# Altium PCB MOTOR_DRIVER.PcbDoc (part 1 of 2)
Units mm, origin at the board's own origin, x right, y up, seen from the top; angles counter-clockwise.
Board outline 115 x 60 mm, 2 copper layers (Top Layer, Bottom Layer), stack 1.58 mm thick; 121 components, 33 nets, 418 pads, 33 vias.
Unrouted connection lines stored in the file: 233.
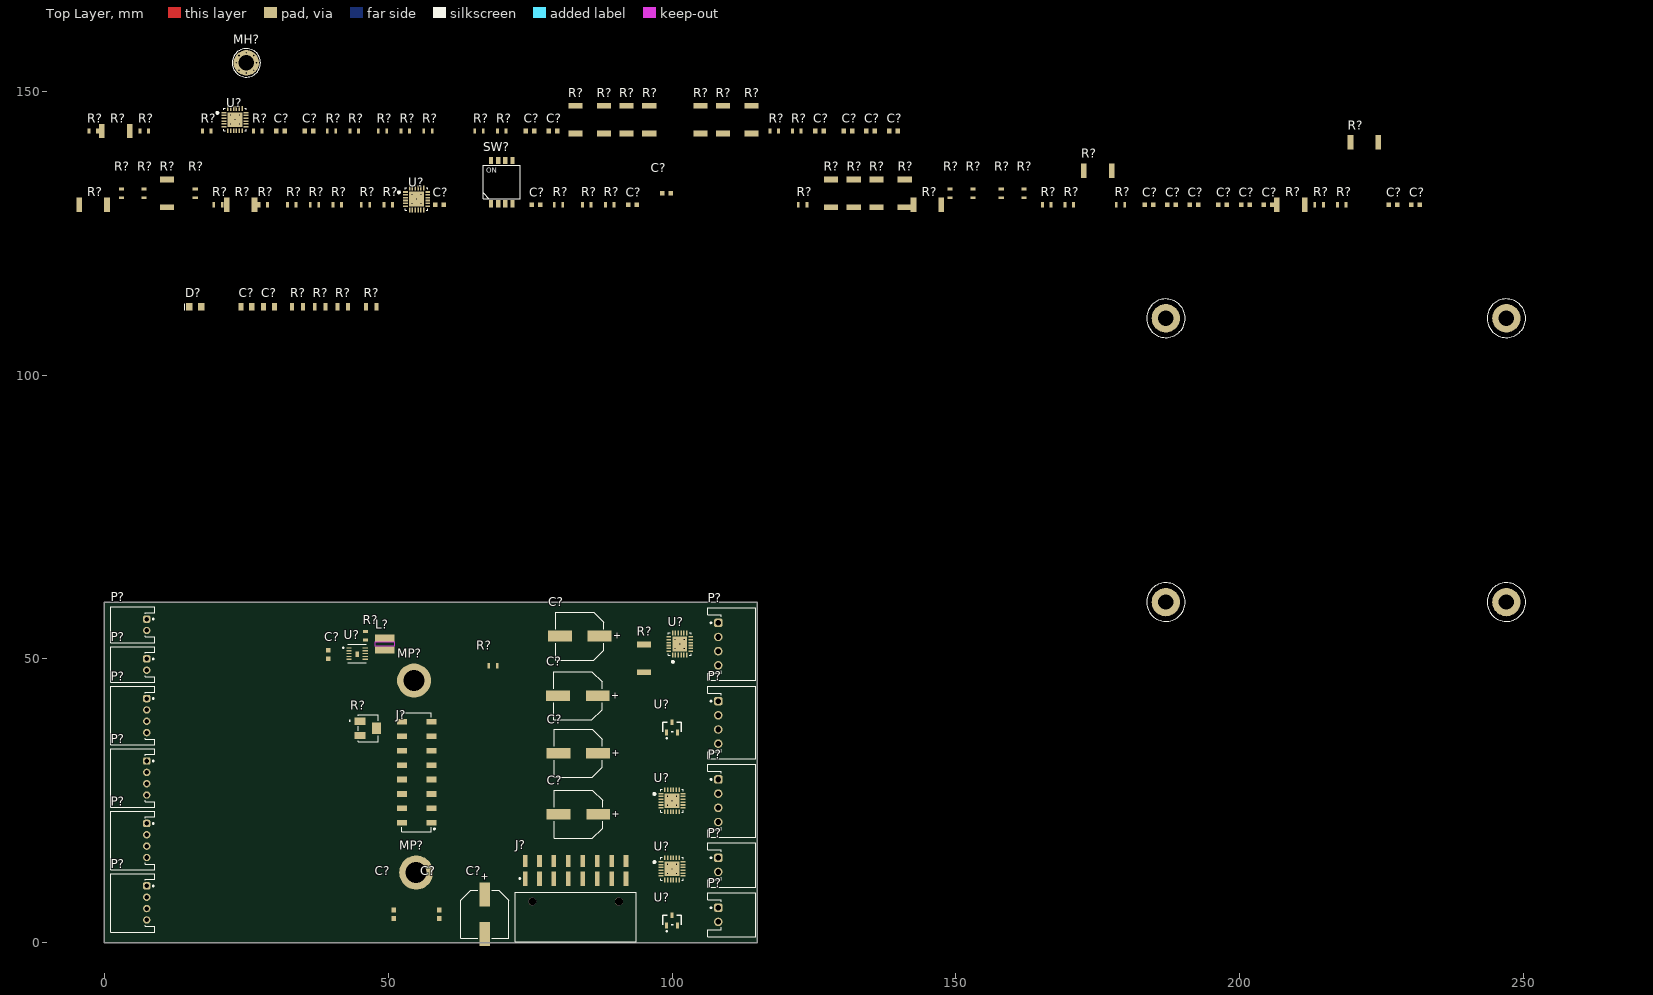
[diagram p0: Top Layer view]
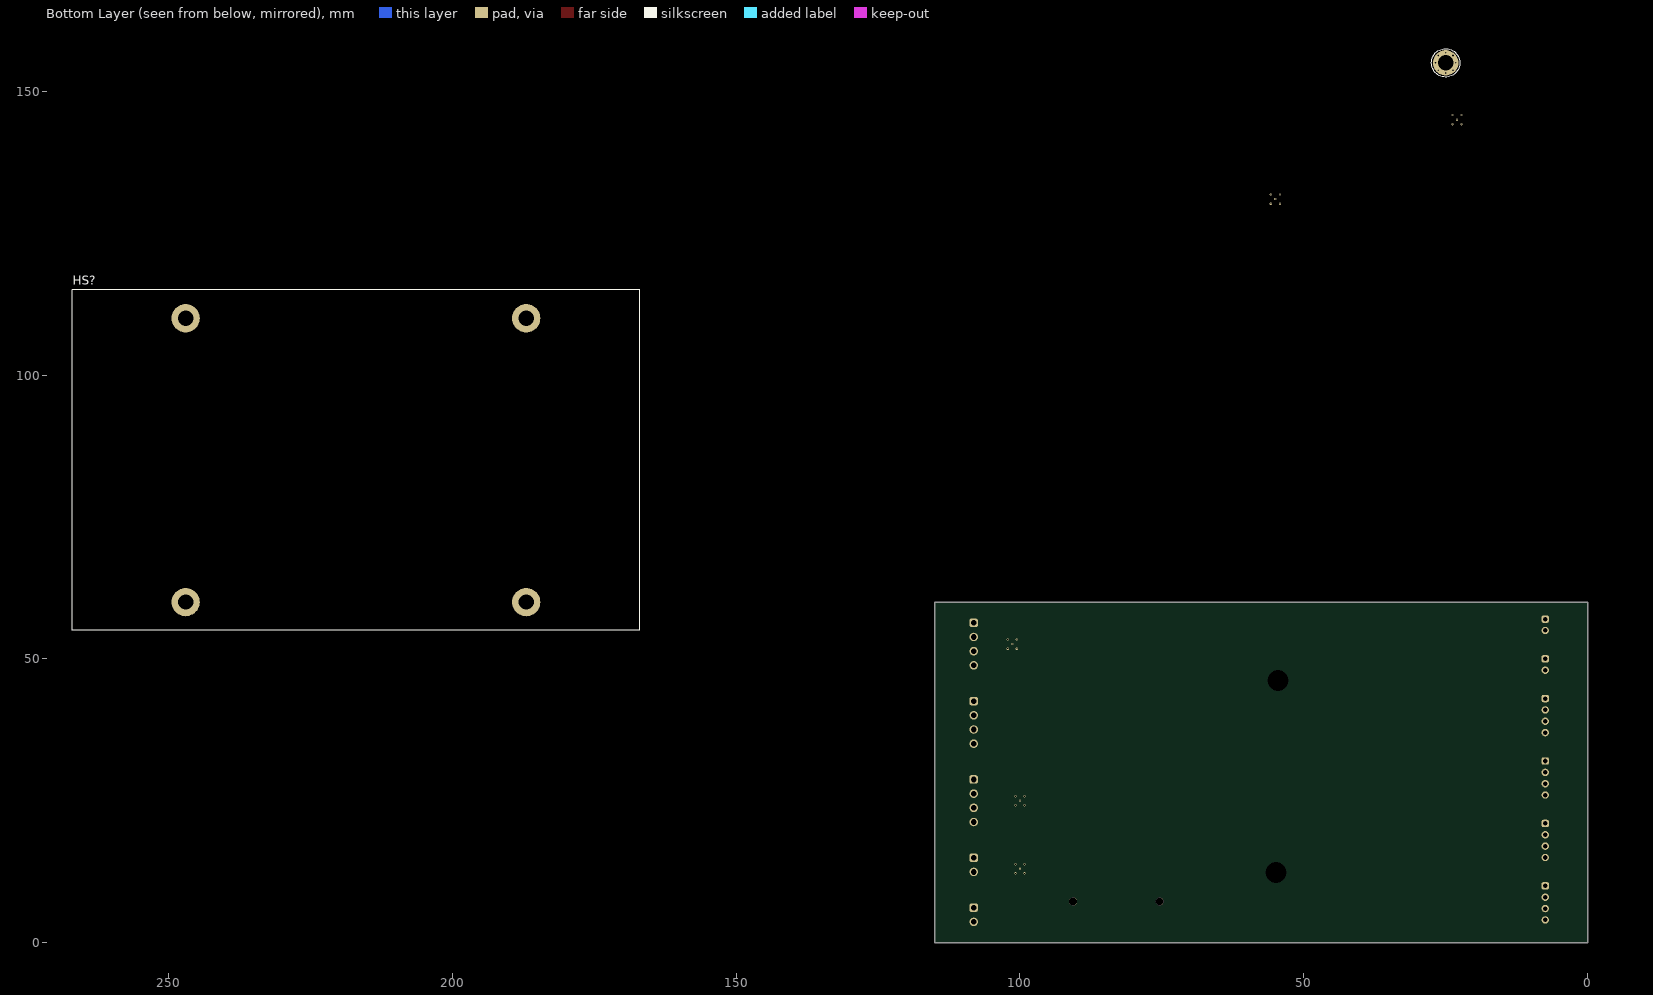
[diagram p1: Bottom Layer view, seen from below]

## Layer stack, top to bottom
Top Solder: solder mask 0.0102, Solder Resist, Dk 3.5
Top Layer: signal copper 0.07
Dielectric 1: dielectric 1.44, FR-4, Dk 4.8
Bottom Layer: signal copper 0.07
Bottom Solder: solder mask 0.0102, Solder Resist, Dk 3.5

## Board outline
0,0 115,0 115,60 0,60

## Design rules (kind name [scope] priority, off if disabled: settings)
Clearance [All] p1: gap=0.18 ignorepadtopadclearanceinfootprint=FALSE
HoleSize [All] p1: absolutevalues=TRUE maxlimit=4 minlimit=0.025 maxpercent=80.000 minpercent=20.000
PolygonConnect [All] p1: connectstyle=Relief reliefconductorwidth=0.254 reliefentries=4 polygonreliefangle="90 Angle" airgapwidth=0.254
RoutingVias [All] p1: holewidth=0.711 width=1.27 viastyle="Through Hole" minholewidth=0.711 minwidth=1.27 maxholewidth=0.711 maxwidth=1.27
SolderMaskExpansion [All] p1: expansion=0.102 istentingtop=FALSE
SupplyNets "Schematic Supply Nets_5" [InNet('GND')] p1: voltage=0.000
SupplyNets "Schematic Supply Nets_9" [InNet('+3V3')] p2: voltage=0.000
SupplyNets "Schematic Supply Nets_8" [InNet('+VREF_STPR')] p3: voltage=0.000
SupplyNets "Schematic Supply Nets_7" [InNet('VREF_STPR')] p4: voltage=0.000
SupplyNets "Schematic Supply Nets_4" [InNet('+VREF_DCMT')] p5: voltage=0.000
SupplyNets "Schematic Supply Nets_1" [InNet('+24V_PSU')] p6: voltage=0.000
SupplyNets "Schematic Supply Nets" [InNet('GND_ISO')] p7: voltage=0.000
Width [All] p1: maxlimit=0.254 minlimit=0.254 preferedwidth=0.254
29 further rules are at their usual default settings.

## Classes and differential pairs
component class 3_MOTORES_DC: C? P? R? U?
component class 2_MOTORES_DE_PASSO: C? P? R? SW? U?
component class 1_ENTRADA_DE_ALIMENTACAO: C? D? HS? J? L? MH? R? U?
component class 5_IO_EXTERNOS: J? MP?

## Components (designator, comment, footprint, x,y, rotation, side; value= is the part's Value field where it differs from the comment)
C? "33μF, 50V" WCAP-ASLI_D8H6.5 67,5 r90 top
C? "10nF, 10V" WCAP-CSGP_0603_L1.6W0.8H0.8_Reflow 184,130 r0 top
C? "10nF, 10V" WCAP-CSGP_0603_L1.6W0.8H0.8_Reflow 205,130 r0 top
C? "330nF, 10V" WCAP-CSGP_0603_L1.6W0.8H0.8_Reflow 76,130 r0 top
C? "1nF, 10V" WCAP-CSGP_0603_L1.6W0.8H0.8_Reflow 188,130 r0 top
C? "330nF, 50V" WCAP-CSGP_0603_L1.6W0.8H0.8_Reflow 197,130 r0 top
C? "33μF, 50V" WCAP-ASLI_D8H6.5 83.425,43.5 r0 top
C? "2.2μF, 10V" WCAP-CSGP_0603_L1.6W0.8H0.8_Reflow 59,5 r90 top
C? "1nF, 10V" WCAP-CSGP_0603_L1.6W0.8H0.8_Reflow 59,130 r0 top
C? "10nF, 10V" WCAP-CSGP_0603_L1.6W0.8H0.8_Reflow 192,130 r0 top
C? "330nF, 50V" WCAP-CSGP_0603_L1.6W0.8H0.8_Reflow 93,130 r0 top
C? "100nF, 50V" WCAP-CSGP_0603_L1.6W0.8H0.8_Reflow 51,5 r90 top
C? "1μF, 50V" WCAP-CSGP_0805_L2W1.25H1.25 29,112 r0 top
C? "470nF, 50V" WCAP-CSGP_0805_L2W1.25H1.25 25,112 r0 top
C? "330nF, 10V" WCAP-CSGP_0603_L1.6W0.8H0.8_Reflow 201,130 r0 top
C? "33μF, 50V" WCAP-ASLI_D8H6.5 83.475,33.35 r0 top
C? "330nF, 10V" WCAP-CSGP_0603_L1.6W0.8H0.8_Reflow 231,130 r0 top
C? "330nF, 50V" WCAP-CSGP_0603_L1.6W0.8H0.8_Reflow 227,130 r0 top
C? "1nF, 10V" WCAP-CSGP_0603_L1.6W0.8H0.8_Reflow 99,132 r0 top
C? "33μF, 50V" WCAP-ASLI_D8H6.5 83.5,22.6 r0 top
C? "10nF, 10V" WCAP-CSGP_0603_L1.6W0.8H0.8_Reflow 79,143 r0 top
C? "10nF, 10V" WCAP-CSGP_0603_L1.6W0.8H0.8_Reflow 75,143 r0 top
C? "1nF, 10V" WCAP-CSGP_0603_L1.6W0.8H0.8_Reflow 31,143 r0 top
C? "1nF, 10V" WCAP-CSGP_0603_L1.6W0.8H0.8_Reflow 36,143 r0 top
C? "330nF, 10V" WCAP-CSGP_0603_L1.6W0.8H0.8_Reflow 131,143 r0 top
C? "330nF, 10V" WCAP-CSGP_0603_L1.6W0.8H0.8_Reflow 126,143 r0 top
C? "330nF, 50V" WCAP-CSGP_0603_L1.6W0.8H0.8_Reflow 139,143 r0 top
C? "330nF, 50V" WCAP-CSGP_0603_L1.6W0.8H0.8_Reflow 135,143 r0 top
C? "33μF, 50V" WCAP-ASLI_D8H6.5 83.75,54 r0 top
C? "NM" WCAP-CSGP_0603_L1.6W0.8H0.8_Reflow 39.425,50.75 r90 top
D? "Red, 2V, 140°" WL-SMCW_0805_150080xx75000 16,112 r0 top
HS? "HEATSINK" ? 167,55 r90 bottom
J? "610116249221" 610116249221 83,4.5 r0 top
J? "61031621821" 61031621821 55,30 r90 top
L? "47uH, 500mA" WE-MAIA_3015 49.375,52.6 r90 top
MH? "Mounting Hole 2.5mm" MOUNTING_HOLE_M2P5_PLATED 25,155 r0 top
MP? "M2.5 x 10mm" 9774100151 54.55,46.175 r0 top
MP? "M2.5 x 10mm" 9774100151 54.925,12.35 r0 top
P? "62000411722" 62000411722 5,18 r270 top
P? "62000411722" 62000411722 5,40 r270 top
P? "62000411722" 62000411722 5,29 r270 top
P? "62000211722" 62000211722 5,49 r270 top
P? "62000211722" 62000211722 5,56 r270 top
P? "62000411722" 62000411722 5,7 r270 top
P? "68800211722" 68800211722 110.5,13.7 r90 top
P? "68800211722" 68800211722 110.5,4.9 r90 top
P? "68800411722" 68800411722 110.5,25 r90 top
P? "68800411722" 68800411722 110.5,38.8 r90 top
P? "68800411722" 68800411722 110.5,52.6 r90 top
R? "10kΩ" 0603-REFLOW 41,130 r0 top
R? "47.5kΩ" 0603-REFLOW 7,132 r90 top
R? "47.5kΩ" 0603-REFLOW 80,130 r0 top
R? "10kΩ" 0603-REFLOW 37,130 r0 top
R? "0.51Ω" 2010-REFLOW 145,130 r0 top value=510mΩ
R? "0.51Ω" 2010-REFLOW -2,130 r0 top value=510mΩ
R? "11.5kΩ" 0603-REFLOW 46,130 r0 top
R? "10kΩ" 0603-REFLOW 33,130 r0 top
R? "22.1kΩ" 0603-REFLOW 123,130 r0 top
R? "10kΩ" 0603-REFLOW 28,130 r0 top
R? "10kΩ" 0603-REFLOW 16,132 r90 top
R? "1kΩ" 0603-REFLOW 89,130 r0 top
R? "0.51Ω" 2010-REFLOW 222,141 r0 top value=510mΩ
R? "100Ω" 0603-REFLOW 214,130 r0 top
R? "0.51Ω" 2010-REFLOW 136,132 r90 top value=510mΩ
R? "0.51Ω" 2010-REFLOW 141,132 r90 top value=510mΩ
R? "8.87kΩ" 0603-REFLOW 3,132 r90 top
R? "100Ω" 0603-REFLOW 149,132 r90 top
R? "10kΩ" 0603-REFLOW 85,130 r0 top
R? "8.87kΩ" 0603-REFLOW 162,132 r90 top
R? "1kΩ" 0603-REFLOW 158,132 r90 top
R? "0.51Ω" 2010-REFLOW 128,132 r90 top value=510mΩ
R? "0.51Ω" 2010-REFLOW 132,132 r90 top value=510mΩ
R? "47.5kΩ" 0603-REFLOW 153,132 r90 top
R? "0Ω" 0603-REFLOW 45.975,54.05 r270 top
R? "8.87kΩ" 0805-REFLOW 47,112 r0 top
R? "8.87kΩ" 0805-REFLOW 38,112 r0 top
R? "8.87kΩ" 0805-REFLOW 42,112 r0 top
R? "8.87kΩ" 0805-REFLOW 34,112 r0 top
R? "47.5kΩ" 0603-REFLOW 218,130 r0 top
R? "0.51Ω" 2010-REFLOW 11,132 r90 top value=510mΩ
R? "0.51Ω" 2010-REFLOW 209,130 r0 top value=510mΩ
R? "0Ω" 0603-REFLOW 18,143 r0 top
R? "0.51Ω" 2010-REFLOW 2,143 r0 top value=510mΩ
R? "47.5kΩ" 0603-REFLOW 49,143 r0 top
R? "47.5kΩ" 0603-REFLOW 53,143 r0 top
R? "47.5kΩ" 0603-REFLOW 40,143 r0 top
R? "47.5kΩ" 0603-REFLOW 44,143 r0 top
R? "39.2kΩ" 0603-REFLOW 122,143 r0 top
R? "39.2kΩ" 0603-REFLOW 118,143 r0 top
R? "1kΩ" 0603-REFLOW 7,143 r0 top
R? "18.2kΩ" 0603-REFLOW 70,143 r0 top
R? "18.2kΩ" 0603-REFLOW 66,143 r0 top
R? "1kΩ" 0603-REFLOW -2,143 r0 top
R? "39.2kΩ" 0603-REFLOW 57,143 r0 top
R? "39.2kΩ" 0603-REFLOW 68.45,48.775 r0 top
R? "11.5kΩ" 0603-REFLOW 27,143 r0 top
R? "10kΩ, 1/4W" TRIM-3224W 46.45,37.75 r0 top value=10kΩ
R? "0.51Ω" 2010-REFLOW 88,145 r90 top value=510mΩ
R? "0.51Ω" 2010-REFLOW 105,145 r90 top value=510mΩ
R? "0.51Ω" 2010-REFLOW 175,136 r0 top value=510mΩ
R? "0.51Ω" 2010-REFLOW 24,130 r0 top value=510mΩ
R? "22.1kΩ" 0603-REFLOW 20,130 r0 top
R? "0.51Ω" 2010-REFLOW 83,145 r90 top value=510mΩ
R? "47.5kΩ" 0603-REFLOW 166,130 r0 top
R? "22.1kΩ" 0603-REFLOW 50,130 r0 top
R? "10kΩ" 0603-REFLOW 179,130 r0 top
R? "0.51Ω" 2010-REFLOW 92,145 r90 top value=510mΩ
R? "0.51Ω" 2010-REFLOW 95.075,50.075 r90 top value=510mΩ
R? "0.51Ω" 2010-REFLOW 96,145 r90 top value=510mΩ
R? "0.51Ω" 2010-REFLOW 114,145 r90 top value=510mΩ
R? "0.51Ω" 2010-REFLOW 109,145 r90 top value=510mΩ
R? "47.5kΩ" 0603-REFLOW 170,130 r0 top
SW? "416131160804" 416131160804 70,134 r0 top
U? "STSPIN820" 24-TQFPN 23,145 r0 top
U? "STSPIN840" 24-TQFPN 101.35,52.6 r90 top
U? "STSPIN820" 24-TQFPN 55,131 r0 top
U? "TS3431CILT" SOT-23-3 100,38 r0 top
U? "STSPIN820" 24-TQFPN 100,13 r0 top
U? "TS3431CILT" SOT-23-3 100,4 r0 top
U? "L7983PU33R" 10-WFDFN-EP 44.5,50.925 r0 top
U? "STSPIN840" 24-TQFPN 100,25 r0 top

## Footprints (in the part's own frame and the unit in brackets; to place one, negate y for a bottom-side part, rotate by r counter-clockwise, add the part's x,y. Pads: shape width x height; smd on the part's side, far side on the other; paste and mask are expansions set on the pad)
10-WFDFN-EP [mil]
  rect 35.43x9 smd paste+0 mask+0: 1(-57,39.37) 2(-57,19.69) 3(-57,0) 4(-57,-19.68) 5(-57,-39.37) 6(57,-39.37) 7(57,-19.68) 8(57,0) 9(57,19.69) 10(57,39.37)
  rect 24x39 smd paste+0 mask+0: 11(0,-5.91)
  silkscreen extent -98,-64 64,64, body extent -59,-59 59,59, height 30
24-TQFPN [mm]
  rect 0.84x0.27 smd mask+0: 1(-1.945,1.25) 2(-1.945,0.75) 3(-1.945,0.25) 4(-1.945,-0.25) 5(-1.945,-0.75) 6(-1.945,-1.25) 13(1.945,-1.25) 14(1.945,-0.75) 15(1.945,-0.25) 16(1.945,0.25) 17(1.945,0.75) 18(1.945,1.25)
  rect 0.27x0.84 smd mask+0: 7(-1.25,-1.945) 8(-0.75,-1.945) 9(-0.25,-1.945) 10(0.25,-1.945) 11(0.75,-1.945) 12(1.25,-1.945) 19(1.25,1.945) 20(0.75,1.945) 21(0.25,1.945) 22(-0.25,1.945) 23(-0.75,1.945) 24(-1.25,1.945)
  rect 2.6x2.6 smd paste-2539.97 mask+0: 25(0,0)
  silkscreen extent -3.22,-2 2,2, body extent -2,-2 2,2, height 1.1
0603-REFLOW [mm]
  rect 0.5x0.9 smd: 1(-0.75,0) 2(0.75,0)
  body extent -0.8,-0.4 0.8,0.4, height 0.45
0805-REFLOW [mm]
  rect 0.7x1.3 smd: 1(-0.95,0) 2(0.95,0)
  body extent -1,-0.63 1,0.62, height 0.5
2010-REFLOW [mm]
  rect 1x2.5 smd: 1(-2.45,0) 2(2.45,0)
  body extent -2.45,-1.2 2.45,1.2, height 0.55
9774100151 [mm] "SMT Steel Spacer with internal Thread M2.5, height 10mm"
  round 6 / inner round 0 / far side round 0 hole 3.7 unplated: 1(0,0)
  body extent -2.55,-2.55 2.55,2.55, height 10
61031621821 [mm] "Socket Header, Pitch 2.54 mm, SMT, Vertical, dual row, 16p"
  rect 1x1.8 smd: 1(-8.89,-2.6) 2(-8.89,2.6) 3(-6.35,-2.6) 4(-6.35,2.6) 5(-3.81,-2.6) 6(-3.81,2.6) 7(-1.27,-2.6) 8(-1.27,2.6) 9(1.27,-2.6) 10(1.27,2.6) 11(3.81,-2.6) 12(3.81,2.6) 13(6.35,-2.6) 14(6.35,2.6) 15(8.89,-2.6) 16(8.89,2.6)
  silkscreen extent -10.49,-3.27 10.49,2.62, body extent -10.16,-3.35 10.16,3.35, height 8.52
62000211722 [mm] "2.00mm Male Horizontal Shrouded Header, 2p"
  rrect50% 1.3x1.3 hole 0.8: 1(-1,2.45)
  round 1.3 hole 0.8: 2(1,2.45)
  silkscreen extent -3.15,-3.9 3.15,3.9, body extent -3,-3.8 3,3.8, height 4.83
62000411722 [mm] "2.00mm Male Horizontal Shrouded Header, 4p"
  rrect50% 1.3x1.3 hole 0.8: 1(-3,2.45)
  round 1.3 hole 0.8: 2(-1,2.45) 3(1,2.45) 4(3,2.45)
  silkscreen extent -5.15,-3.9 5.15,3.9, body extent -5,-3.8 5,3.8, height 4.83
68800211722 [mm] "2.50mm ¡°J¡± Type Male Horizontal Shrouded Header, 2p"
  rrect50% 1.5x1.5 hole 1: 1(1.25,2.35)
  round 1.5 hole 1: 2(-1.25,2.35)
  silkscreen extent -3.9,-4.25 3.9,4.25, body extent -3.75,-4.15 3.75,4.15, height 4.23
68800411722 [mm] "2.50mm ¡°J¡± Type Male Horizontal Shrouded Header, 4p"
  rrect50% 1.5x1.5 hole 1: 1(3.75,2.35)
  round 1.5 hole 1: 2(1.25,2.35) 3(-1.25,2.35) 4(-3.75,2.35)
  silkscreen extent -6.4,-4.25 6.4,4.25, body extent -6.25,-4.15 6.25,4.15, height 4.23
416131160804 [mm] "SMD Dip Switch, Small Compact, Raised Actuator, 4pin"
  rect 0.76x1.27 smd: 1(-1.905,-3.81) 2(-0.635,-3.81) 3(0.635,-3.81) 4(1.905,-3.81) 5(1.905,3.81) 6(0.635,3.81) 7(-0.635,3.81) 8(-1.905,3.81)
  silkscreen extent -3.27,-2.93 3.27,2.93, body extent -3.12,-4.22 3.13,4.22, height 2.7
610116249221 [mm] "Socket Header, Pitch 2.54 mm, SMT, Angled, dual row, 16p"
  rect 0.8x2.5 smd: 1(-8.89,6.76) 3(-6.35,6.76) 5(-3.81,6.76) 7(-1.27,6.76) 9(1.27,6.76) 11(3.81,6.76) 13(6.35,6.76) 15(8.89,6.76)
  rect 0.8x2.1 smd: 2(-8.89,9.89) 4(-6.35,9.89) 6(-3.81,9.89) 8(-1.27,9.89) 10(1.27,9.89) 12(3.81,9.89) 14(6.35,9.89) 16(8.89,9.89)
  round 1.4 hole 1.4 unplated: MH1(-7.62,2.75) MH2(7.62,2.75)
  silkscreen extent -10.66,-4.35 10.66,6.9, body extent -10.41,-4.25 10.41,10.44, height 5.03
MOUNTING_HOLE_M2P5_PLATED [mm]
  round 4.5 hole 2.7: H(0,0)
  silkscreen extent -2.5,-2.5 2.5,2.5
SOT-23-3 [mil]
  rect 20x40 smd mask+3.94: 1(-37.4,-38) 2(37.4,-38) 3(0,32.75)
  silkscreen extent -65,-84 65,32, body extent -57,-47 57,47, height 44
TRIM-3224W [mm]
  rect 1.9x1.3 smd: 1(-1.45,1.25) 3(-1.45,-1.25)
  rect 1.6x2 smd: 2(1.45,0)
  silkscreen extent -3.32,-2.4 1.75,2.4, body extent -1.95,-2.4 1.95,2.4, height 5.3
WCAP-ASLI_D8H6.5 [mm] "Aluminium Electrolytic V-Chip SMT Capacitors, 8x6.5mm"
  rect 4.2x1.9 smd: 1(3.5,0) 2(-3.5,0)
  silkscreen extent -4.25,-4.25 4.25,4.25, body extent -4.5,-4.15 4.5,4.15, height 6.45
WCAP-CSGP_0603_L1.6W0.8H0.8_Reflow [mm] "Ceramic Capacitors, body 1.6x0.8mm"
  rect 0.8x0.8 smd: 1(-0.75,0) 2(0.75,0)
  body extent -0.8,-0.4 0.8,0.4, height 0.8
WCAP-CSGP_0805_L2W1.25H1.25 [mm] "Ceramic Capacitors, body 2x1.25mm"
  rect 0.9x1.3 smd: 1(-0.95,0) 2(0.95,0)
  body extent -1,-0.63 1,0.63, height 1.25
WE-MAIA_3015 [mm] "SMD Power Inductor, 2-leads, body 3x3mm"
  rect 1.3x3.4 smd: 1(-1.05,0) 2(1.05,0)
  Top Layer keep-out region: -0.4,1.7 0.4,1.7 0.4,-1.7 -0.4,-1.7
  body extent -1.5,-1.5 1.5,1.5, height 1.5
WL-SMCW_0805_150080xx75000 [mm] "SMD Mono-color Chip LED, body 2.0x1.25mm"
  rect 1.1x1.3 smd: 1(-1.05,0) 2(1.05,0)
  silkscreen extent -2,-0.6 -1.8,0.6, body extent -1,-0.63 1,0.62, height 0.7
? [mm]
  round 5 hole 2.7: H1(5,80) H1(55,80) H2(5,20) H2(55,20)
  silkscreen extent 0,0 60,100, body extent 0,0 60,100, height 10

## Part data
C? C? C? C? C?: library part 865080649011, "WCAP-ASLI Aluminum Electrolytic Capacitor, V-Chip, SMT, 8mm x 6.5mm, 33μF, 50V", Capacitance=33uF, Leakage Current=16.5uA, Manufacturer="Wurth Elektronik", Operating Temperature Max=105degC, Operating Temperature Min=-55degC, Rated Voltage (DC)=50V, Ripple Current=200mA, Category="Aluminum Electrolytic Capacitors", ComponentLink1Description="Website Link", ComponentLink1URL=https://www.we-online.com/redexpert/article/865080649011?ad, ComponentLink2Description="Datasheet Link", ComponentLink2URL=https://www.we-online.com/redexpert/spec/865080649011?ad, Diameter=8mm, Dissipation Factor=12%, Endurance=2000h, Height=6.5mm, Impedance=700mohm, Manufacturer Part Number=865080649011, Match Code=WCAP-ASLI, Mount="Surface Mount", Packaging="Tape and Reel"
C? C? C? C? C?: library part 885012206014, "WCAP-CSGP Multilayer Ceramic Chip Capacitor, General Purpose, size 0603, 10nF, 10V", Capacitance=10nF, Capacitance Tolerance=+/-10%, Case/Size Code=0603, Insulation Resistance=10GΩ, Manufacturer="Wurth Elektronik", Max Operating Temperature=125°C, Min Operating Temperature=-55°C, Rated Voltage (DC)=10V, Category="Multilayer Ceramic Chip Capacitors", Ceramic Type=X7R, ComponentLink1Description="Website Link", ComponentLink1URL=https://www.we-online.com/redexpert/article/885012206014?ad, ComponentLink2Description="Datasheet Link", ComponentLink2URL=https://www.we-online.com/redexpert/spec/885012206014?ad, Dissipation Factor=5%, Height=0.8mm, Length=1.6mm, Manufacturer Part Number=885012206014, Match Code=WCAP-CSGP, Mount="Surface Mount", Packaging="Tape and Reel", Technical Reference=X7R0603103K010DFCT10000, Width=0.8mm
C? C? C? C? C?: library part 885012206023, "WCAP-CSGP Multilayer Ceramic Chip Capacitor, General Purpose, size 0603, 330nF, 10V", Capacitance=330nF, Capacitance Tolerance=+/-10%, Case/Size Code=0603, Insulation Resistance=1.5GΩ, Manufacturer="Wurth Elektronik", Max Operating Temperature=125°C, Min Operating Temperature=-55°C, Rated Voltage (DC)=10V, Category="Multilayer Ceramic Chip Capacitors", Ceramic Type=X7R, ComponentLink1Description="Website Link", ComponentLink1URL=https://www.we-online.com/redexpert/article/885012206023?ad, ComponentLink2Description="Datasheet Link", ComponentLink2URL=https://www.we-online.com/redexpert/spec/885012206023?ad, Dissipation Factor=10%, Height=0.8mm, Length=1.6mm, Manufacturer Part Number=885012206023, Match Code=WCAP-CSGP, Mount="Surface Mount", Packaging="Tape and Reel", Technical Reference=X7R0603334K010DFCT10000, Width=0.8mm
C? C? C? C? C?: library part 885012206008, "WCAP-CSGP Multilayer Ceramic Chip Capacitor, General Purpose, size 0603, 1nF, 10V", Capacitance=1nF, Capacitance Tolerance=+/-10%, Case/Size Code=0603, Insulation Resistance=10GΩ, Manufacturer="Wurth Elektronik", Max Operating Temperature=125°C, Min Operating Temperature=-55°C, Rated Voltage (DC)=10V, Category="Multilayer Ceramic Chip Capacitors", Ceramic Type=X7R, ComponentLink1Description="Website Link", ComponentLink1URL=https://www.we-online.com/redexpert/article/885012206008?ad, ComponentLink2Description="Datasheet Link", ComponentLink2URL=https://www.we-online.com/redexpert/spec/885012206008?ad, Dissipation Factor=5%, Height=0.8mm, Length=1.6mm, Manufacturer Part Number=885012206008, Match Code=WCAP-CSGP, Mount="Surface Mount", Packaging="Tape and Reel", Technical Reference=X7R0603102K010DFCT10000, Width=0.8mm
C? C? C? C? C?: library part 885012206121, "WCAP-CSGP Multilayer Ceramic Chip Capacitor, General Purpose, size 0603, 330nF, 50V", Capacitance=330nF, Capacitance Tolerance=+/-10%, Case/Size Code=0603, Insulation Resistance=1.5GΩ, Manufacturer="Wurth Elektronik", Max Operating Temperature=125°C, Min Operating Temperature=-55°C, Rated Voltage (DC)=50V, Category="Multilayer Ceramic Chip Capacitors", Ceramic Type=X7R, ComponentLink1Description="Website Link", ComponentLink1URL=https://www.we-online.com/redexpert/article/885012206121?ad, ComponentLink2Description="Datasheet Link", ComponentLink2URL=https://www.we-online.com/redexpert/spec/885012206121?ad, Dissipation Factor=10%, Height=0.8mm, Length=1.6mm, Manufacturer Part Number=885012206121, Match Code=WCAP-CSGP, Mount="Surface Mount", Packaging="Tape and Reel", Technical Reference=X7R0603334K050DFCT10000, Width=0.8mm
C?: library part 885012206027, "WCAP-CSGP Multilayer Ceramic Chip Capacitor, General Purpose, size 0603, 2.2μF, 10V", Capacitance=2.2uF, Capacitance Tolerance=+/-10%, Case/Size Code=0603, Insulation Resistance=0.02Gohm, Manufacturer="Wurth Elektronik", Operating Temperature Max=125degC, Operating Temperature Min=-55degC, Rated Voltage (DC)=10V, Category="Multilayer Ceramic Chip Capacitors", Ceramic Type=X7R, ComponentLink1Description="Website Link", ComponentLink1URL=https://www.we-online.com/redexpert/article/885012206027?ad, ComponentLink2Description="Datasheet Link", ComponentLink2URL=https://www.we-online.com/redexpert/spec/885012206027?ad, Dissipation Factor=10%, Height=0.8mm, Length=1.6mm, Manufacturer Part Number=885012206027, Match Code=WCAP-CSGP, Mount="Surface Mount", Packaging="Tape and Reel", Technical Reference=X7R0603225K010DFCT10000, Width=0.8mm
C?: library part 885012206095, "WCAP-CSGP Multilayer Ceramic Chip Capacitor, General Purpose, size 0603, 100nF, 50V", Capacitance=100nF, Capacitance Tolerance=+/-10%, Case/Size Code=0603, Insulation Resistance=5Gohm, Manufacturer="Wurth Elektronik", Operating Temperature Max=125degC, Operating Temperature Min=-55degC, Rated Voltage (DC)=50V, Category="Multilayer Ceramic Chip Capacitors", Ceramic Type=X7R, ComponentLink1Description="Website Link", ComponentLink1URL=https://www.we-online.com/redexpert/article/885012206095?ad, ComponentLink2Description="Datasheet Link", ComponentLink2URL=https://www.we-online.com/redexpert/spec/885012206095?ad, Dissipation Factor=3%, Height=0.8mm, Length=1.6mm, Manufacturer Part Number=885012206095, Match Code=WCAP-CSGP, Mount="Surface Mount", Packaging="Tape and Reel", Technical Reference=X7R0603104K050DFCT10000, Width=0.8mm
C?: library part 885012207103R, "WCAP-CSGP Multilayer Ceramic Chip Capacitor, General Purpose, size 0805, 1μF, 50V", Capacitance=1uF, Capacitance Tolerance=+/-10%, Case/Size Code=0805, Insulation Resistance=0.1Gohm, Manufacturer="Wurth Elektronik", Operating Temperature Max=125degC, Operating Temperature Min=-55degC, Rated Voltage (DC)=50V, Category="Multilayer Ceramic Chip Capacitors", Ceramic Type=X7R, ComponentLink1Description="Website Link", ComponentLink1URL=https://www.we-online.com/redexpert/article/885012207103R?ad, ComponentLink2Description="Datasheet Link", ComponentLink2URL=https://www.we-online.com/redexpert/spec/885012207103R?ad, Dissipation Factor=10%, Height=1.25mm, Length=2mm, Manufacturer Part Number=885012207103R, Match Code=WCAP-CSGP, Mount="Surface Mount", Packaging="Tape and Reel", Technical Reference=X7R0805105K050DFCT20000, Width=1.25mm
C?: library part 885012207102, "WCAP-CSGP Multilayer Ceramic Chip Capacitor, General Purpose, size 0805, 470nF, 50V", Capacitance=470nF, Capacitance Tolerance=+/-10%, Case/Size Code=0805, Insulation Resistance=1.1Gohm, Manufacturer="Wurth Elektronik", Operating Temperature Max=125degC, Operating Temperature Min=-55degC, Rated Voltage (DC)=50V, Category="Multilayer Ceramic Chip Capacitors", Ceramic Type=X7R, ComponentLink1Description="Website Link", ComponentLink1URL=https://www.we-online.com/redexpert/article/885012207102?ad, ComponentLink2Description="Datasheet Link", ComponentLink2URL=https://www.we-online.com/redexpert/spec/885012207102?ad, Dissipation Factor=3%, Height=1.25mm, Length=2mm, Manufacturer Part Number=885012207102, Match Code=WCAP-CSGP, Mount="Surface Mount", Packaging="Tape and Reel", Technical Reference=X7R0805474K050DFCT10000, Width=1.25mm
C?: library part 885012206022, "WCAP-CSGP Multilayer Ceramic Chip Capacitor, General Purpose, size 0603, 220nF, 10V", Capacitance=220nF, Capacitance Tolerance=+/-10%, Case/Size Code=0603, Insulation Resistance=2.3Gohm, Manufacturer="Wurth Elektronik", Operating Temperature Max=125degC, Operating Temperature Min=-55degC, Rated Voltage (DC)=10V, Category="Multilayer Ceramic Chip Capacitors", Ceramic Type=X7R, ComponentLink1Description="Website Link", ComponentLink1URL=https://www.we-online.com/redexpert/article/885012206022?ad, ComponentLink2Description="Datasheet Link", ComponentLink2URL=https://www.we-online.com/redexpert/spec/885012206022?ad, Dissipation Factor=5%, Height=0.8mm, Length=1.6mm, Manufacturer Part Number=885012206022, Match Code=WCAP-CSGP, Mount="Surface Mount", Packaging="Tape and Reel", Technical Reference=X7R0603224K010DFCT10000, Width=0.8mm
D?: library part 150080RS75000, "WL-SMCW Mono-color Chip LED Waterclear, SMT, size 0805, Red, 2V, 140°", Case/Size Code=0805, Emitting Color=Red, Forward Voltage=2V, Manufacturer="Wurth Elektronik", Max Operating Temperature=85°C, Min Operating Temperature=-40°C, Category="Signal LEDs", Chip Technology=AlInGaP, ComponentLink1Description="Website Link", ComponentLink1URL=https://www.we-online.com/redexpert/article/150080RS75000?ad, ComponentLink2Description="Datasheet Link", ComponentLink2URL=https://www.we-online.com/redexpert/spec/150080RS75000?ad, Dominant Wavelength=625nm, Height=0.7mm, Length=2mm, Luminous Intensity=150mcd, Manufacturer Part Number=150080RS75000, Match Code=WL-SMCW, Mount="Surface Mount", Packaging="Tape and Reel", Peak Wavelength=630nm, Viewing Angle=140°, Width=1.25mm
HS?: library part GENERIC-HEATSINK-100X60X10MM-LD, "GENERIC HEATSINK 100X60X10MM", Manufacturer=OEM, Manufacturer Part Number=None
J?: "WR-PHD Socket Header, SMT, Angled, pitch 2.54mm, 2 Row, 16P", Contact Resistance=20mOhm, Manufacturer="Wurth Elektronik", Operating Temperature Max=105degC, Operating Temperature Min=-40degC, Rated Current=3A, Withstanding Voltage=600V, Working Voltage=250V, Category="Board-to-Board Connectors", ComponentLink1Description="Website Link", ComponentLink1URL=https://www.we-online.com/redexpert/article/610116249221?ad, ComponentLink2Description="Datasheet Link", ComponentLink2URL=https://www.we-online.com/redexpert/spec/610116249221?ad, Gender="Socket Header", Lead Pitch=2.54mm, Manufacturer Part Number=610116249221, Match Code=WR-PHD, Mount="Surface Mount", Number of Pins=16, Number of Rows=2, Orientation=Angled, Packaging="Tape and Reel"
J?: "WR-PHD Socket Header, SMT, Vertical, pitch 2.54mm, 2 Row, 16P", Contact Resistance=20mOhm, Manufacturer="Wurth Elektronik", Operating Temperature Max=105degC, Operating Temperature Min=-40degC, Rated Current=3A, Withstanding Voltage=600V, Working Voltage=250V, Category="Board-to-Board Connectors", ComponentLink1Description="Website Link", ComponentLink1URL=https://www.we-online.com/redexpert/article/61031621821?ad, ComponentLink2Description="Datasheet Link", ComponentLink2URL=https://www.we-online.com/redexpert/spec/61031621821?ad, Gender="Socket Header", Lead Pitch=2.54mm, Manufacturer Part Number=61031621821, Match Code=WR-PHD, Mount="Surface Mount", Number of Pins=16, Number of Rows=2, Orientation=Vertical, Packaging="Tape and Reel"
L?: library part 78438335470, "WE-MAIA SMT Power Inductor, size 3015, 47uH, 0.5A, 2300mohm", Case/Size Code=3015, DC Resistance Max=2300mohm, Inductance=47uH, Manufacturer="Wurth Elektronik", Operating Temperature Max=125degC, Operating Temperature Min=-40degC, Rated Current=0.5A, Saturation Current @ 10%=0.75A, Saturation Current @ 30%=1.5A, Self Resonant Frequency=8MHz, Automotive=Yes, Category="Power Inductors", ComponentLink1Description="Website Link", ComponentLink1URL=https://www.we-online.com/redexpert/article/78438335470?ad, ComponentLink2Description="Datasheet Link", ComponentLink2URL=https://www.we-online.com/redexpert/spec/78438335470?ad, Height=1.5mm, Length=3mm, Manufacturer Part Number=78438335470, Match Code=WE-MAIA, Mount="Surface Mount", Packaging="Tape and Reel", Width=3mm
MH?: library part MTH-2P5MM-PLATED, "PLATED MOUNTING HOLE WITH 2.5MM DIAMETER"
MP? MP?: library part 9774100151R, "WA-SMSI SMT Steel Spacer with internal Thread, OD 5.1mm, M2.5 x 10mm", Manufacturer="Wurth Elektronik", Operating Temperature Max=150degC, Operating Temperature Min=-55degC, Category="SMT Spacers", ComponentLink1Description="Website Link", ComponentLink1URL=https://www.we-online.com/redexpert/article/9774100151R?ad, ComponentLink2Description="Datasheet Link", ComponentLink2URL=https://www.we-online.com/redexpert/spec/9774100151R?ad, Height=10mm, Inside Diameter=3.5mm, Manufacturer Part Number=9774100151R, Match Code=WA-SMSI, Material=Steel, Mount="Surface Mount", Outside Diameter=5.1mm, Packaging="Tape and Reel", Surface=Tin, Thread Size=M2.5
P? P? P? P?: "WR-WTB THT Male Horizontal Shrouded Header, pitch 2 mm, 4 pins", Contact Resistance="20 mohm", Manufacturer="Wurth Elektronik", Operating Temperature Max=85degC, Operating Temperature Min=-25degC, Rated Current="2 A", Withstanding Voltage="800 V(AC)", Working Voltage="125 V(AC)", Category="Wire-to-Board Connector", ComponentLink1Description="Website Link", ComponentLink1URL=https://www.we-online.com/redexpert/article/62000411722?ad, ComponentLink2Description="Datasheet Link", ComponentLink2URL=https://www.we-online.com/redexpert/spec/62000411722?ad, Gender=Male, Height="4.5 mm", Lead Pitch="2 mm", Length="10 mm", Manufacturer Part Number=62000411722, Match Code=WR-WTB, Mount="Through Hole", Number of Pins=4, Number of Rows=1, Orientation=Horizontal, Packaging=Bag, Width="7.6 mm"
P? P?: "WR-WTB THT Male Horizontal Shrouded Header, pitch 2 mm, 2 pins", Contact Resistance="20 mohm", Manufacturer="Wurth Elektronik", Operating Temperature Max=85degC, Operating Temperature Min=-25degC, Rated Current="2 A", Withstanding Voltage="800 V(AC)", Working Voltage="125 V(AC)", Category="Wire-to-Board Connector", ComponentLink1Description="Website Link", ComponentLink1URL=https://www.we-online.com/redexpert/article/62000211722?ad, ComponentLink2Description="Datasheet Link", ComponentLink2URL=https://www.we-online.com/redexpert/spec/62000211722?ad, Gender=Male, Height="4.5 mm", Lead Pitch="2 mm", Length="6 mm", Manufacturer Part Number=62000211722, Match Code=WR-WTB, Mount="Through Hole", Number of Pins=2, Number of Rows=1, Orientation=Horizontal, Packaging=Bag, Width="7.6 mm"
P? P?: "WR-WTB “J” Type THT Male Horizontal Shrouded Header, pitch 2.5 mm, 2 pins", Contact Resistance="20 mohm", Manufacturer="Wurth Elektronik", Operating Temperature Max=85degC, Operating Temperature Min=-25degC, Rated Current="3 A", Withstanding Voltage="800 V(AC)", Working Voltage="250 V(AC)", Category="Wire-to-Board Connector", ComponentLink1Description="Website Link", ComponentLink1URL=https://www.we-online.com/redexpert/article/68800211722?ad, ComponentLink2Description="Datasheet Link", ComponentLink2URL=https://www.we-online.com/redexpert/spec/68800211722?ad, Gender=Male, Height="4.2 mm", Lead Pitch="2.5 mm", Length="7.5 mm", Manufacturer Part Number=68800211722, Match Code=WR-WTB, Mount="Through Hole", Number of Pins=2, Number of Rows=1, Orientation=Horizontal, Packaging=Bag, Width="8.3 mm"
P? P? P?: "WR-WTB “J” Type THT Male Horizontal Shrouded Header, pitch 2.5 mm, 4 pins", Contact Resistance="20 mohm", Manufacturer="Wurth Elektronik", Operating Temperature Max=85degC, Operating Temperature Min=-25degC, Rated Current="3 A", Withstanding Voltage="800 V(AC)", Working Voltage="250 V(AC)", Category="Wire-to-Board Connector", ComponentLink1Description="Website Link", ComponentLink1URL=https://www.we-online.com/redexpert/article/68800411722?ad, ComponentLink2Description="Datasheet Link", ComponentLink2URL=https://www.we-online.com/redexpert/spec/68800411722?ad, Gender=Male, Height="4.2 mm", Lead Pitch="2.5 mm", Length="12.5 mm", Manufacturer Part Number=68800411722, Match Code=WR-WTB, Mount="Through Hole", Number of Pins=4, Number of Rows=1, Orientation=Horizontal, Packaging=Bag, Width="8.3 mm"
R? R? R? R? R? R? R?: library part RC0603FR-0710KL, "RES 10K OHM 1% 1/10W 0603", Case Code (Imperial)=0603, Case Code (Metric)=1608, Manufacturer="Yageo Group", Max Operating Temperature=155°C, Max Power Dissipation=100mW, Min Operating Temperature=-55°C, Supplier Part Number=311-10.0KHRCT-ND, Temperature Coefficient=±200ppm/°C, Tolerance=1%, Voltage Rating=75V, Voltage Rating (AC)=50V, Case/Package=0603, Category="Chip SMD Resistors", China RoHS=Non-Compliant, Component Link Description=https://www.yageogroup.com/content/datasheet/asset/file/PYU-RC_GROUP_51_ROHS_L, Component Link URL=https://www.yageogroup.com/content/datasheet/asset/file/PYU-RC_GROUP_51_ROHS_L, Composition="Thick Film", Contact Plating=Tin, Datasheet=https://www.yageogroup.com/content/datasheet/asset/file/PYU-RC_GROUP_51_ROHS_L, Depth=800µm, Features="Moisture Resistant", Height=450µm, Lead Free="Lead Free", Length=1.6mm, Lifecycle Status=Production, Manufacturer Part Number=RC0603FR-0710KL, Military Standard=Not, Mounting Technology="Surface Mount", Number of Terminals=2, Number of Terminations=2, Packaging="Tape & Reel", Power Dissipation=100mW, Power Rating=100mW, Radiation Hardening=No, REACH SVHC=Yes, RoHS=Compliant, Supplier=DigiKey, Termination=SMD/SMT, Voltage Rating (DC)=50V, Weight=2.012816mg, Width=800µm, Working Voltage=75V
R? R? R? R? R? R? R? R? R? R?: library part RC0603FR-0747K5L, "RES 47.5K OHM 1% 1/10W 0603", Case Code (Imperial)=0603, Case Code (Metric)=1608, Manufacturer="Yageo Group", Max Operating Temperature=155°C, Max Power Dissipation=100mW, Min Operating Temperature=-55°C, Supplier Part Number=311-47.5KHRCT-ND, Temperature Coefficient=±200ppm/°C, Tolerance=1%, Voltage Rating=75V, Voltage Rating (AC)=50V, Case/Package=0603, Category="Chip SMD Resistors", China RoHS=Non-Compliant, Component Link Description=https://www.yageogroup.com/content/datasheet/asset/file/PYU-RC_GROUP_51_ROHS_L, Component Link URL=https://www.yageogroup.com/content/datasheet/asset/file/PYU-RC_GROUP_51_ROHS_L, Composition="Thick Film", Contact Plating=Tin, Datasheet=https://www.yageogroup.com/content/datasheet/asset/file/PYU-RC_GROUP_51_ROHS_L, Depth=800µm, Features="Moisture Resistant", Height=450µm, Lead Free="Lead Free", Length=1.6mm, Lifecycle Status=Production, Manufacturer Part Number=RC0603FR-0747K5L, Military Standard=Not, Mounting Technology="Surface Mount", Number of Terminals=2, Number of Terminations=2, Packaging="Tape & Reel", Power Dissipation=100mW, Power Rating=100mW, Radiation Hardening=No, REACH SVHC=Yes, RoHS=Compliant, Supplier=DigiKey, Termination=SMD/SMT, Voltage Rating (DC)=50V, Weight=2.012816mg, Width=800µm, Working Voltage=75V
R? R? R? R? R? R? R? R? R? R? R? R? R? R? R? R? R? R? R? R?: library part RCWE2010R510FKEA, "RES 0.51 OHM 1% 1W 2010", Case Code (Imperial)=2010, Case Code (Metric)=5025, Manufacturer=Vishay, Max Operating Temperature=155°C, Max Power Dissipation=1W, Min Operating Temperature=-55°C, Supplier Part Number=RCWE.51GCT-ND, Temperature Coefficient=100ppm/°C, Tolerance=1%, Working Voltage=714.1mV, Case/Package=2010, Category="Chip SMD Resistors", China RoHS=Non-Compliant, ComponentLink1Description=https://datasheet.octopart.com:443/RCWE2010R510FKEA-Vishay-datasheet-170667730.pdf?src-supplier=IHS, ComponentLink1URL=https://datasheet.octopart.com:443/RCWE2010R510FKEA-Vishay-datasheet-170667730.pdf?src-supplier=IHS, ComponentLink2Description=https://datasheet.octopart.com:443/RCWE2010R510FKEA-Vishay-datasheet-78835242.pdf?src-supplier=Newark, ComponentLink2URL=https://datasheet.octopart.com:443/RCWE2010R510FKEA-Vishay-datasheet-78835242.pdf?src-supplier=Newark, ComponentLink3Description=https://datasheet.octopart.com:443/RCWE2010R510FKEA-Vishay-datasheet-10025643.pdf?src-supplier=element14+APAC, ComponentLink3URL=https://datasheet.octopart.com:443/RCWE2010R510FKEA-Vishay-datasheet-10025643.pdf?src-supplier=element14+APAC, ComponentLink4Description=http://sigma.octopart.com:80/rohs_statement/Vishay-company-15.pdf?src-supplier=Compliance+Statements, ComponentLink4URL=http://sigma.octopart.com:80/rohs_statement/Vishay-company-15.pdf?src-supplier=Compliance+Statements, Composition="Thick Film", Contact Plating=Tin, Features="Automotive AEC-Q200, Moisture Resistant", Height=600µm, Length=5.0038mm, Lifecycle Status=Production, Manufacturer Part Number=RCWE2010R510FKEA, Mounting Technology="Surface Mount", Number of Terminals=2, Number of Terminations=2, Pins=2, Power Dissipation=1W, Power Rating=1W, Pricing="1=0.65, 10=0.417, 25=0.3544, 50=0.3156, 100=0.2824, 250=0.24596, 500=0.22314, 1000=0.20376 (USD)", Radiation Hardening=No, REACH SVHC=Yes, RoHS=Compliant, Schedule B="8533210045, 8533210045|8533210045|8533210045|8533210045|8533210045", Stock=6435, Supplier=DigiKey, Termination=SMD/SMT, Width=2.5mm
R? R?: library part RC0603FR-0711K5L, "RES 11.5K OHM 1% 1/10W 0603", Case Code (Imperial)=0603, Case Code (Metric)=1608, Manufacturer="Yageo Group", Max Operating Temperature=155°C, Max Power Dissipation=100mW, Min Operating Temperature=-55°C, Supplier Part Number=311-11.5KHRCT-ND, Temperature Coefficient=±200ppm/°C, Tolerance=1%, Voltage Rating=75V, Voltage Rating (AC)=50V, Case/Package=0603, Category="Chip SMD Resistors", China RoHS=Non-Compliant, Component Link Description=https://www.yageogroup.com/content/datasheet/asset/file/PYU-RC_GROUP_51_ROHS_L, Component Link URL=https://www.yageogroup.com/content/datasheet/asset/file/PYU-RC_GROUP_51_ROHS_L, Composition="Thick Film", Contact Plating=Tin, Datasheet=https://www.yageogroup.com/content/datasheet/asset/file/PYU-RC_GROUP_51_ROHS_L, Depth=800µm, Features="Moisture Resistant", Height=450µm, Lead Free="Lead Free", Length=1.6mm, Lifecycle Status=Production, Manufacturer Part Number=RC0603FR-0711K5L, Military Standard=Not, Mounting Technology="Surface Mount", Number of Terminals=2, Number of Terminations=2, Packaging="Tape & Reel", Power Dissipation=100mW, Power Rating=100mW, Radiation Hardening=No, REACH SVHC=Yes, RoHS=Compliant, Supplier=DigiKey, Termination=SMD/SMT, Voltage Rating (DC)=50V, Weight=2.012816mg, Width=800µm, Working Voltage=75V
R? R? R?: library part RC0603FR-0722K1L, "RES 22.1K OHM 1% 1/10W 0603", Case Code (Imperial)=0603, Case Code (Metric)=1608, Manufacturer="Yageo Group", Max Operating Temperature=155°C, Max Power Dissipation=100mW, Min Operating Temperature=-55°C, Supplier Part Number=311-22.1KHRCT-ND, Temperature Coefficient=±200ppm/°C, Tolerance=1%, Voltage Rating=75V, Voltage Rating (AC)=50V, Case/Package=0603, Category="Chip SMD Resistors", China RoHS=Non-Compliant, Component Link Description=https://www.yageogroup.com/content/datasheet/asset/file/PYU-RC_GROUP_51_ROHS_L, Component Link URL=https://www.yageogroup.com/content/datasheet/asset/file/PYU-RC_GROUP_51_ROHS_L, Composition="Thick Film", Contact Plating=Tin, Datasheet=https://www.yageogroup.com/content/datasheet/asset/file/PYU-RC_GROUP_51_ROHS_L, Depth=800µm, Features="Moisture Resistant", Height=450µm, Lead Free="Lead Free", Length=1.6mm, Lifecycle Status=Production, Manufacturer Part Number=RC0603FR-0722K1L, Military Standard=Not, Mounting Technology="Surface Mount", Number of Terminals=2, Number of Terminations=2, Packaging="Tape & Reel", Power Dissipation=100mW, Power Rating=100mW, Radiation Hardening=No, REACH SVHC=Yes, RoHS=Compliant, Supplier=DigiKey, Termination=SMD/SMT, Voltage Rating (DC)=50V, Weight=2.012816mg, Width=800µm, Working Voltage=75V
R? R? R? R?: library part RC0603FR-071KL, "RES 1K OHM 1% 1/10W 0603", Case Code (Imperial)=0603, Case Code (Metric)=1608, Manufacturer="Yageo Group", Max Operating Temperature=155°C, Max Power Dissipation=100mW, Min Operating Temperature=-55°C, Supplier Part Number=311-1.00KHRCT-ND, Temperature Coefficient=±200ppm/°C, Tolerance=1%, Voltage Rating=75V, Voltage Rating (AC)=50V, Case/Package=0603, Category="Chip SMD Resistors", China RoHS=Non-Compliant, Component Link Description=https://www.yageogroup.com/content/datasheet/asset/file/PYU-RC_GROUP_51_ROHS_L, Component Link URL=https://www.yageogroup.com/content/datasheet/asset/file/PYU-RC_GROUP_51_ROHS_L, Composition="Thick Film", Contact Plating=Tin, Datasheet=https://www.yageogroup.com/content/datasheet/asset/file/PYU-RC_GROUP_51_ROHS_L, Depth=800µm, Features="Moisture Resistant", Height=450µm, Lead Free="Lead Free", Length=1.6mm, Lifecycle Status=Production, Manufacturer Part Number=RC0603FR-071KL, Military Standard=Not, Mounting Technology="Surface Mount", Number of Terminals=2, Number of Terminations=2, Packaging="Tape & Reel", Power Dissipation=100mW, Power Rating=100mW, Radiation Hardening=No, REACH SVHC=Yes, RoHS=Compliant, Supplier=DigiKey, Termination=SMD/SMT, Voltage Rating (DC)=50V, Weight=2.012816mg, Width=800µm, Working Voltage=75V
R? R?: library part RC0603FR-07100RL, "RES 100 OHM 1% 1/10W 0603", Case Code (Imperial)=0603, Case Code (Metric)=1608, Manufacturer="Yageo Group", Max Operating Temperature=155°C, Max Power Dissipation=100mW, Min Operating Temperature=-55°C, Supplier Part Number=311-100HRCT-ND, Temperature Coefficient=±200ppm/°C, Tolerance=1%, Voltage Rating=75V, Voltage Rating (AC)=50V, Case/Package=0603, Category="Chip SMD Resistors", China RoHS=Non-Compliant, Component Link Description=https://www.yageogroup.com/content/datasheet/asset/file/PYU-RC_GROUP_51_ROHS_L, Component Link URL=https://www.yageogroup.com/content/datasheet/asset/file/PYU-RC_GROUP_51_ROHS_L, Composition="Thick Film", Contact Plating=Tin, Datasheet=https://www.yageogroup.com/content/datasheet/asset/file/PYU-RC_GROUP_51_ROHS_L, Depth=800µm, Features="Moisture Resistant", Height=450µm, Lead Free="Lead Free", Length=1.6mm, Lifecycle Status=Production, Manufacturer Part Number=RC0603FR-07100RL, Military Standard=Not, Mounting Technology="Surface Mount", Number of Terminals=2, Number of Terminations=2, Packaging="Tape & Reel", Power Dissipation=100mW, Power Rating=100mW, Radiation Hardening=No, REACH SVHC=Yes, RoHS=Compliant, Supplier=DigiKey, Termination=SMD/SMT, Voltage Rating (DC)=50V, Weight=2.012816mg, Width=800µm, Working Voltage=75V
R? R?: library part RC0603FR-078K87L, "RES 8.87K OHM 1% 1/10W 0603", Case Code (Imperial)=0603, Case Code (Metric)=1608, Manufacturer="Yageo Group", Max Operating Temperature=155°C, Max Power Dissipation=100mW, Min Operating Temperature=-55°C, Supplier Part Number=311-8.87KHRCT-ND, Temperature Coefficient=±200ppm/°C, Tolerance=1%, Voltage Rating=75V, Voltage Rating (AC)=50V, Case/Package=0603, Category="Chip SMD Resistors", China RoHS=Non-Compliant, Component Link Description=https://www.yageogroup.com/content/datasheet/asset/file/PYU-RC_GROUP_51_ROHS_L, Component Link URL=https://www.yageogroup.com/content/datasheet/asset/file/PYU-RC_GROUP_51_ROHS_L, Composition="Thick Film", Contact Plating=Tin, Datasheet=https://www.yageogroup.com/content/datasheet/asset/file/PYU-RC_GROUP_51_ROHS_L, Depth=800µm, Features="Moisture Resistant", Height=450µm, Lead Free="Lead Free", Length=1.6mm, Lifecycle Status=Production, Manufacturer Part Number=RC0603FR-078K87L, Military Standard=Not, Mounting Technology="Surface Mount", Number of Terminals=2, Number of Terminations=2, Packaging="Tape & Reel", Power Dissipation=100mW, Power Rating=100mW, Radiation Hardening=No, REACH SVHC=Yes, RoHS=Compliant, Supplier=DigiKey, Termination=SMD/SMT, Voltage Rating (DC)=50V, Weight=2.012816mg, Width=800µm, Working Voltage=75V
R? R?: library part RC0603FR-070RL, "RES 0 OHM 1% 1/10W 0603", Case Code (Imperial)=0603, Case Code (Metric)=1608, Manufacturer="Yageo Group", Max Operating Temperature=155°C, Max Power Dissipation=100mW, Min Operating Temperature=-55°C, Supplier Part Number=311-0.0HRCT-ND, Temperature Coefficient=±200ppm/°C, Tolerance=1%, Voltage Rating=75V, Voltage Rating (AC)=50V, Case/Package=0603, Category="Chip SMD Resistors", China RoHS=Non-Compliant, Component Link Description=https://www.yageogroup.com/content/datasheet/asset/file/PYU-RC_GROUP_51_ROHS_L, Component Link URL=https://www.yageogroup.com/content/datasheet/asset/file/PYU-RC_GROUP_51_ROHS_L, Composition="Thick Film", Contact Plating=Tin, Datasheet=https://www.yageogroup.com/content/datasheet/asset/file/PYU-RC_GROUP_51_ROHS_L, Depth=800µm, Features="Moisture Resistant", Height=450µm, Lead Free="Lead Free", Length=1.6mm, Lifecycle Status=Production, Manufacturer Part Number=RC0603FR-070RL, Military Standard=Not, Mounting Technology="Surface Mount", Number of Terminals=2, Number of Terminations=2, Packaging="Tape & Reel", Power Dissipation=100mW, Power Rating=100mW, Radiation Hardening=No, REACH SVHC=Yes, RoHS=Compliant, Supplier=DigiKey, Termination=SMD/SMT, Voltage Rating (DC)=50V, Weight=2.012816mg, Width=800µm, Working Voltage=75V
R? R? R? R?: library part RC0805FR-078K87L, "RES 8.87K OHM 1% 1/8W 0805", Case Code (Imperial)=0805, Manufacturer="Yageo Group", Max Operating Temperature=155°C, Max Power Dissipation=125mW, Min Operating Temperature=-55°C, Supplier Part Number=311-8.87KCRCT-ND, Temperature Coefficient=100ppm/°C, Tolerance=1%, Voltage Rating=150V, Case/Package=0805, Category="Chip SMD Resistors", China RoHS=Non-Compliant, ComponentLink1Description=https://datasheet.octopart.com:443/RC0805FR-078K87L-Yageo-datasheet-175887523.pdf?src-supplier=Newark, ComponentLink1URL=https://datasheet.octopart.com:443/RC0805FR-078K87L-Yageo-datasheet-175887523.pdf?src-supplier=Newark, ComponentLink2Description=https://datasheet.octopart.com:443/RC0805FR-078K87L-Yageo-datasheet-103092701.pdf?src-supplier=Upverter, ComponentLink2URL=https://datasheet.octopart.com:443/RC0805FR-078K87L-Yageo-datasheet-103092701.pdf?src-supplier=Upverter, ComponentLink3Description=https://datasheet.octopart.com:443/RC0805FR-078K87L-Yageo-Group-datasheet-176638170.pdf?src-supplier=Future+Electronics, ComponentLink3URL=https://datasheet.octopart.com:443/RC0805FR-078K87L-Yageo-Group-datasheet-176638170.pdf?src-supplier=Future+Electronics, ComponentLink4Description=https://datasheet.octopart.com:443/RC0805FR-078K87L-Yageo-datasheet-164759695.pdf?src-supplier=Future+Electronics, ComponentLink4URL=https://datasheet.octopart.com:443/RC0805FR-078K87L-Yageo-datasheet-164759695.pdf?src-supplier=Future+Electronics, ComponentLink5Description=https://datasheet.octopart.com:443/RC0805FR-078K87L-Yageo-datasheet-12592811.pdf?src-supplier=Future+Electronics, ComponentLink5URL=https://datasheet.octopart.com:443/RC0805FR-078K87L-Yageo-datasheet-12592811.pdf?src-supplier=Future+Electronics, ComponentLink6Description=https://datasheet.octopart.com:443/RC0805FR-078K87L-Yageo-datasheet-8330313.pdf?src-supplier=Future+Electronics, ComponentLink6URL=https://datasheet.octopart.com:443/RC0805FR-078K87L-Yageo-datasheet-8330313.pdf?src-supplier=Future+Electronics, ComponentLink7Description=https://datasheet.octopart.com:443/RC0805FR-078K87L-Yageo-datasheet-8324252.pdf?src-supplier=Future+Electronics, ComponentLink7URL=https://datasheet.octopart.com:443/RC0805FR-078K87L-Yageo-datasheet-8324252.pdf?src-supplier=Future+Electronics, ComponentLink8Description=https://datasheet.octopart.com/RC0805FR-078K87L-Yageo-datasheet-73766026.pdf, ComponentLink8URL=https://datasheet.octopart.com/RC0805FR-078K87L-Yageo-datasheet-73766026.pdf, ComponentLink9Description=https://datasheet.octopart.com:443/RC0805FR-078K87L-Yageo-datasheet-118657.pdf?src-supplier=DigiKey, ComponentLink9URL=https://datasheet.octopart.com:443/RC0805FR-078K87L-Yageo-datasheet-118657.pdf?src-supplier=DigiKey, ComponentLink10Description=http://sigma.octopart.com:80/conflict_mineral_statement/Yageo-company-3.pdf?src-supplier=Compliance+Statements, ComponentLink10URL=http://sigma.octopart.com:80/conflict_mineral_statement/Yageo-company-3.pdf?src-supplier=Compliance+Statements, ComponentLink11Description=http://sigma.octopart.com:80/rohs_statement/Yageo-company-2.pdf?src-supplier=Compliance+Statements, ComponentLink11URL=http://sigma.octopart.com:80/rohs_statement/Yageo-company-2.pdf?src-supplier=Compliance+Statements, Composition="Thick Film", Contact Plating="Lead, Tin", Depth=1.25mm, Features="Moisture Resistant", Height=500µm, Lead Free="Lead Free", Length=2mm, Lifecycle Status=Production, Manufacturer Part Number=RC0805FR-078K87L, Military Standard=Not, Mounting Technology="Surface Mount", Number of Terminals=2, Number of Terminations=2, Power Dissipation=125mW, Power Rating=125mW, Pricing="1=0.1, 10=0.008, 25=0.0072 (USD)", Radiation Hardening=No, REACH SVHC=Yes, RoHS=Compliant, Schedule B="8533210045, 8533210045|8533210045|8533210045|8533210045|8533210045", Stock=98675, Supplier=DigiKey, Termination=SMD/SMT, Voltage Rating (DC)=150V, Width=1.25mm, Working Voltage=150V
R? R? R? R?: library part RC0603FR-0739K2L, "RES 39.2K OHM 1% 1/10W 0603", Case Code (Imperial)=0603, Case Code (Metric)=1608, Manufacturer="Yageo Group", Max Operating Temperature=155°C, Max Power Dissipation=100mW, Min Operating Temperature=-55°C, Supplier Part Number=311-39.2KHRCT-ND, Temperature Coefficient=±200ppm/°C, Tolerance=1%, Voltage Rating=75V, Voltage Rating (AC)=50V, Case/Package=0603, Category="Chip SMD Resistors", China RoHS=Non-Compliant, Component Link Description=https://www.yageogroup.com/content/datasheet/asset/file/PYU-RC_GROUP_51_ROHS_L, Component Link URL=https://www.yageogroup.com/content/datasheet/asset/file/PYU-RC_GROUP_51_ROHS_L, Composition="Thick Film", Contact Plating=Tin, Datasheet=https://www.yageogroup.com/content/datasheet/asset/file/PYU-RC_GROUP_51_ROHS_L, Depth=800µm, Features="Moisture Resistant", Height=450µm, Lead Free="Lead Free", Length=1.6mm, Lifecycle Status=Production, Manufacturer Part Number=RC0603FR-0739K2L, Military Standard=Not, Mounting Technology="Surface Mount", Number of Terminals=2, Number of Terminations=2, Packaging="Tape & Reel", Power Dissipation=100mW, Power Rating=100mW, Radiation Hardening=No, REACH SVHC=Yes, RoHS=Compliant, Supplier=DigiKey, Termination=SMD/SMT, Voltage Rating (DC)=50V, Weight=2.012816mg, Width=800µm, Working Voltage=75V
R? R?: library part RC0603FR-0718K2L, "RES 18.2K OHM 1% 1/10W 0603", Case Code (Imperial)=0603, Case Code (Metric)=1608, Manufacturer="Yageo Group", Max Operating Temperature=155°C, Max Power Dissipation=100mW, Min Operating Temperature=-55°C, Supplier Part Number=311-18.2KHRCT-ND, Temperature Coefficient=±200ppm/°C, Tolerance=1%, Voltage Rating=75V, Voltage Rating (AC)=50V, Case/Package=0603, Category="Chip SMD Resistors", China RoHS=Non-Compliant, Component Link Description=https://www.yageogroup.com/content/datasheet/asset/file/PYU-RC_GROUP_51_ROHS_L, Component Link URL=https://www.yageogroup.com/content/datasheet/asset/file/PYU-RC_GROUP_51_ROHS_L, Composition="Thick Film", Contact Plating=Tin, Datasheet=https://www.yageogroup.com/content/datasheet/asset/file/PYU-RC_GROUP_51_ROHS_L, Depth=800µm, Features="Moisture Resistant", Height=450µm, Lead Free="Lead Free", Length=1.6mm, Lifecycle Status=Production, Manufacturer Part Number=RC0603FR-0718K2L, Military Standard=Not, Mounting Technology="Surface Mount", Number of Terminals=2, Number of Terminations=2, Packaging="Tape & Reel", Power Dissipation=100mW, Power Rating=100mW, Radiation Hardening=No, REACH SVHC=Yes, RoHS=Compliant, Supplier=DigiKey, Termination=SMD/SMT, Voltage Rating (DC)=50V, Weight=2.012816mg, Width=800µm, Working Voltage=75V